# Altium PCB TransceiverBoard.PcbDoc (part 2 of 2)
Units mm, origin at the board's own origin, x right, y up, seen from the top; angles counter-clockwise.
Board outline 152.4 x 101.6 mm, 4 copper layers (Top Layer, Layer 2, Layer 1, Bottom Layer), stack 1.57 mm thick; 106 components, 66 nets, 334 pads, 4 vias.
Unrouted connection lines stored in the file: 243.
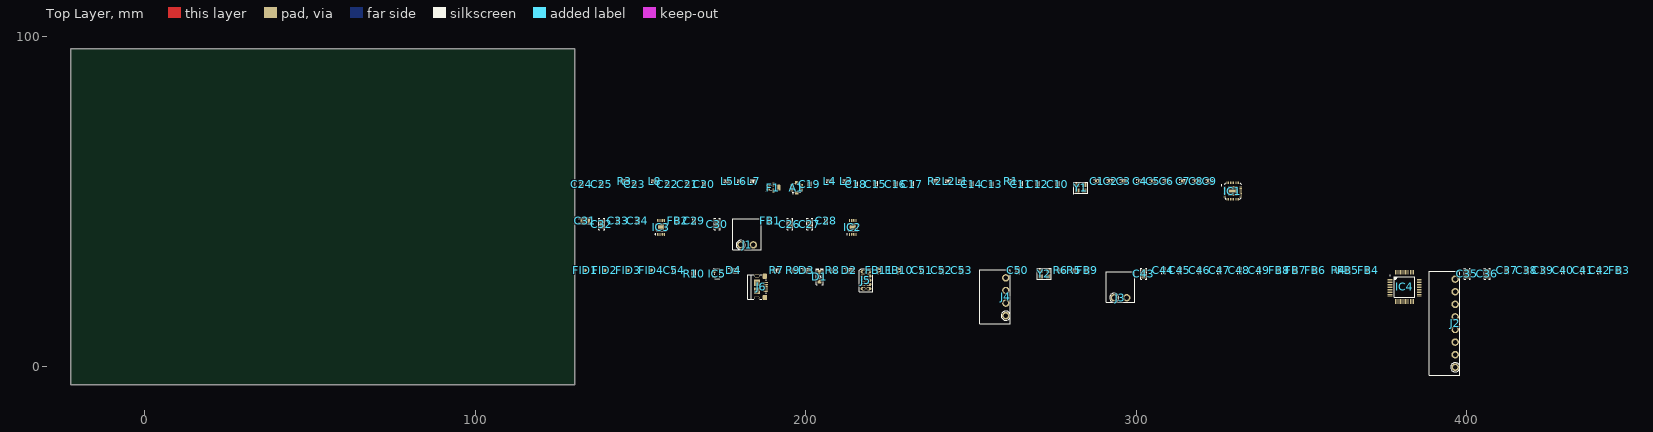
[diagram p0: Top Layer view]

## Part data (continued)
FB1 FB2 FB3 FB4 FB5 FB6 FB7 FB8 FB9 FB10 FB11: library part "Ferrite Chip", "Ferrite Beads Multi-Layer 1KOhm 25% 100MHz 350mA 490mOhm DCR 0402 T/R", Case Code (Imperial)=0402, Case Code (Metric)=1005, Current Rating=350mA, DC Resistance (DCR)=490mR, Manufacturer 1=Murata, Manufacturer Part Number 1=BLM15AX102SN1D, Max Operating Temperature=125°C, Min Operating Temperature=-55°C, Package Quantity=1, Supplier Part Number 1=490-5442-1-ND, Test Frequency=100MHz, Tolerance=25%, Case/Package=0402, Category="Ferrite Beads and Chips", ComponentLink1Description=https://datasheet.ciiva.com/41425/001171674-da-01-en-chip-drossel0402-1000r-350ma-1-0x0-5mm-41425706.pdf?src-supplier=Conrad, ComponentLink1URL=https://datasheet.ciiva.com/41425/001171674-da-01-en-chip-drossel0402-1000r-350ma-1-0x0-5mm-41425706.pdf?src-supplier=Conrad, ComponentLink2Description=https://datasheet.ciiva.com/41449/001172166-da-01-en-drossel-0402-1000r-31-0x0-5mm-10000st-41449452.pdf?src-supplier=Conrad, ComponentLink2URL=https://datasheet.ciiva.com/41449/001172166-da-01-en-drossel-0402-1000r-31-0x0-5mm-10000st-41449452.pdf?src-supplier=Conrad, ComponentLink3Description=https://datasheet.ciiva.com/1012/l0110e-1012389.pdf?src-supplier=Digi-Key, ComponentLink3URL=https://datasheet.ciiva.com/1012/l0110e-1012389.pdf?src-supplier=Digi-Key, ComponentLink4Description=https://datasheet.ciiva.com/1012/l0110e-1012390.pdf?src-supplier=Digi-Key, ComponentLink4URL=https://datasheet.ciiva.com/1012/l0110e-1012390.pdf?src-supplier=Digi-Key, ComponentLink5Description=https://datasheet.ciiva.com/1012/l0110e-1012391.pdf?src-supplier=Digi-Key, ComponentLink5URL=https://datasheet.ciiva.com/1012/l0110e-1012391.pdf?src-supplier=Digi-Key, ComponentLink6Description=https://datasheet.ciiva.com/16420/l0110s0100blm15ax-sn-16420798.pdf?src-supplier=Future+Electronics, ComponentLink6URL=https://datasheet.ciiva.com/16420/l0110s0100blm15ax-sn-16420798.pdf?src-supplier=Future+Electronics, Depth=0.5mm, Height=0.5mm, Impedance=1kR, Lead Free="Lead Free", Length=1mm, Material=Ferrite,Steel, Max Current Rating=350mA, Max DC Current=350mA, Number of Circuits=1, Number of Lines=1, Number of Pins=2, Packaging="Tape and Reel", Pricing 1="1=0.11000, 10=0.09000, 25=0.08120, 50=0.05960, 100=0.05140, 250=0.04060, 500=0.03428, 1000=0.02886, 5000=0.02571 (USD)", REACH SVHC="No SVHC", RoHS=Yes, Stock 1=214606, Supplier 1=Digi-Key, Termination=SMD/SMT, Width=0.5mm
IC1: library part "SCH - RF - IC - TI CC1120", "RF Transceiver Ultra-Hi Perf RF Narrowbd Transceiver", Case/Package=VQFN, Current - Receiving=27mA, Current - Transmitting=56mA, Frequency=960MHz, Manufacturer 1="Texas Instruments", Manufacturer Part Number 1=CC1125RHBT, Max Operating Temperature=85°C, Max Supply Voltage=3.6V, Min Operating Temperature=-40°C, Min Supply Voltage=2V, Package Quantity=250, Supplier Part Number 1=296-38891-1-ND, Category="Interface ICs", ComponentLink1Description=https://datasheet.ciiva.com/12179/swrs120a-224860-12179361.pdf?src-supplier=Mouser, ComponentLink1URL=https://datasheet.ciiva.com/12179/swrs120a-224860-12179361.pdf?src-supplier=Mouser, ComponentLink2Description=https://datasheet.ciiva.com/46417/1816568-46417707.pdf?src-supplier=Element14, ComponentLink2URL=https://datasheet.ciiva.com/46417/1816568-46417707.pdf?src-supplier=Element14, ComponentLink3Description=https://datasheet.ciiva.com/46417/1816568-46417708.pdf?src-supplier=Element14, ComponentLink3URL=https://datasheet.ciiva.com/46417/1816568-46417708.pdf?src-supplier=Element14, Contact Plating=Gold,Silver, Data Rate=200Kbps, Density=0B, Interface=SPI, Lead Free="Lead Free", Max Frequency=960MHz, Memory Size=256B, Mount="Surface Mount", Number of GPIO=4, Number of Pins=32, Number of Receivers=1, Number of Transmitters=1, Packaging="Tape and Reel", Pricing 1="1=6.66000, 10=5.94800, 25=5.35360, 100=4.87760 (USD)", REACH SVHC="No SVHC", RoHS=Yes, Sensitivity=-120dBm, Stock 1=160, Supplier 1=Digi-Key
IC2 IC3: library part "LT LT1965 DD/MS8E", "IC REG LINEAR 3.3V 1.1A 8MSOP", Case/Package=SOP, Dropout Voltage=310mV, Manufacturer 1="Analog Devices / Linear Technology", Manufacturer Part Number 1=LT1965EMS8E-3.3#PBF, Max Input Voltage=20V, Max Operating Temperature=125°C, Min Current Limit=1.2A, Min Input Voltage=1.8V, Min Operating Temperature=-40°C, Operating Supply Current=500uA, Output Current=1.1A, Output Voltage=3.3V, Package Quantity=50, Power Supply Rejection Ratio (PSRR)=75dB, Supplier Part Number 1=LT1965EMS8E-3.3#PBF-ND, Category="Voltage Regulators - Switching", ComponentLink1Description=https://datasheet.ciiva.com/2041/25320-2041526.pdf?src-supplier=Digi-Key, ComponentLink1URL=https://datasheet.ciiva.com/2041/25320-2041526.pdf?src-supplier=Digi-Key, Number of Outputs=1, Number of Pins=8, Number of Regulators=1, Packaging=Rail/Tube, Polarity=Positive, Pricing 1="1=3.95000, 25=2.77000, 100=2.36000, 250=2.26560, 500=2.19480 (USD)", RoHS=Yes, Stock 1=719, Supplier 1=Digi-Key
IC4: "IC MCU 32BIT 256KB FLASH 48LQFP", Case/Package=LQFP, Frequency=72MHz, Manufacturer 1="NXP Semiconductors", Manufacturer Part Number 1=LPC1549JBD48QL, Max Operating Temperature=105°C, Max Power Dissipation=1.5W, Max Supply Voltage=3.6V, Min Operating Temperature=-40°C, Min Supply Voltage=2.4V, Operating Supply Voltage=3.3V, Package Quantity=250, Supplier Part Number 1=568-11349-ND, Category=Microcontrollers, ComponentLink1Description=https://datasheet.ciiva.com/29718/lpc15xx-29718838.pdf?src-supplier=Digi-Key, ComponentLink1URL=https://datasheet.ciiva.com/29718/lpc15xx-29718838.pdf?src-supplier=Digi-Key, ComponentLink2Description=https://datasheet.ciiva.com/46427/1802143-46427720.pdf?src-supplier=Element14, ComponentLink2URL=https://datasheet.ciiva.com/46427/1802143-46427720.pdf?src-supplier=Element14, Core Architecture=ARM, Data Bus Width=32b, Interface=I2C,SPI,USB,CAN,UART,USART, Lead Free="Lead Free", Max Frequency=72MHz, Memory Size=256KB, Memory Type=FLASH, Number of ADC Channels=16, Number of I/Os=30, Number of Pins=48, Number of Programmable I/O=30, Number of Timers/Counters=4, Oscillator Type=Internal, Packaging=Tray, Peripherals="Brown-out Detect/Reset,POR,PWM,WDT,DMA", Pricing 1="1=7.29000, 10=6.58500, 25=6.27920, 100=5.45210, 500=4.74766, 1000=4.13505 (USD)", Radiation Hardening=No, RAM Size=36KB, REACH SVHC="No SVHC", RoHS=Yes, Stock 1=822, Supplier 1=Digi-Key, Watchdog Timer=Yes, Weight=6.287584oz
IC5: library part "NXP PRTR5V0U2X", "TVS DIODE 5.5V SOT143B", Manufacturer 1="Nexperia USA", Manufacturer Part Number 1=PRTR5V0U2X,215, Supplier Part Number 1=1727-3884-1-ND, ComponentLink1Description=https://assets.nexperia.com/documents/data-sheet/PRTR5V0U2X.pdf?src-supplier=Digi-Key, ComponentLink1URL=https://assets.nexperia.com/documents/data-sheet/PRTR5V0U2X.pdf?src-supplier=Digi-Key, Pricing 1="1=0.52000, 10=0.44700, 100=0.33400, 500=0.26240, 1000=0.20276 (USD)", RoHS=No, Stock 1=224080, Supplier 1=Digi-Key
J1 J3: "TERM BLOCK HDR 2POS 90DEG 3.81MM", Manufacturer 1=Amphenol, Manufacturer Part Number 1=OQ0232510000G, Supplier Part Number 1=609-3819-ND, ComponentLink1Description=http://www.anytek.com.tw/UserUpFiles/20120526/jMKyryrC5T7A.pdf?src-supplier=Digi-Key, ComponentLink1URL=http://www.anytek.com.tw/UserUpFiles/20120526/jMKyryrC5T7A.pdf?src-supplier=Digi-Key, Pricing 1="1=0.49000, 10=0.25600, 25=0.18120, 50=0.15420, 100=0.14870, 250=0.12572, 500=0.11628, 1000=0.10275, 5000=0.07842 (USD)", RoHS=No, Stock 1=14534, Supplier 1=Digi-Key
J2: "TERM BLOCK HDR 8POS 90DEG 3.81MM", Manufacturer 1="Amphenol Anytek", Manufacturer Part Number 1=OQ0832510000G, Supplier Part Number 1=609-3825-ND, ComponentLink1Description=http://www.anytek.com.tw/UserUpFiles/20120526/jMKyryrC5T7A.pdf?src-supplier=Digi-Key, ComponentLink1URL=http://www.anytek.com.tw/UserUpFiles/20120526/jMKyryrC5T7A.pdf?src-supplier=Digi-Key, Pricing 1="1=1.06000, 10=0.66200, 25=0.56640, 50=0.50920, 100=0.49860, 250=0.42432, 500=0.40310, 1000=0.36067, 5000=0.28217 (USD)", RoHS=No, Stock 1=4787, Supplier 1=Digi-Key
J4: "TERM BLOCK HDR 4POS 90DEG 3.81MM", Manufacturer 1="Amphenol Anytek", Manufacturer Part Number 1=OQ0432510000G, Supplier Part Number 1=609-3821-ND, ComponentLink1Description=http://www.anytek.com.tw/UserUpFiles/20120526/jMKyryrC5T7A.pdf?src-supplier=Digi-Key, ComponentLink1URL=http://www.anytek.com.tw/UserUpFiles/20120526/jMKyryrC5T7A.pdf?src-supplier=Digi-Key, Pricing 1="1=0.71000, 10=0.39000, 25=0.29160, 50=0.25980, 100=0.25480, 250=0.22424, 500=0.20384, 1000=0.18346, 5000=0.13759 (USD)", RoHS=No, Stock 1=2323, Supplier 1=Digi-Key
J6: library part "USB 2.0 Type B Micro", "CONN RCPT USB2.0 MICRO B SMD R/A", Color=Black, Current Rating=1.8A, Flammability Rating="UL94 V-0", Insulation Resistance=1GR, Manufacturer 1="Amphenol FCI", Manufacturer Part Number 1=10118193-0001LF, Max Operating Temperature=85°C, Max Voltage Rating (AC)=100V, Min Operating Temperature=-55°C, Package Quantity=1200, Supplier Part Number 1=609-4616-1-ND, Category="USB Connectors", ComponentLink1Description=https://datasheet.ciiva.com/851/10118193-851106.pdf?src-supplier=Digi-Key, ComponentLink1URL=https://datasheet.ciiva.com/851/10118193-851106.pdf?src-supplier=Digi-Key, ComponentLink2Description=https://datasheet.ciiva.com/14802/10118193-0001lf-webpage-14802386.pdf?src-supplier=Arrow, ComponentLink2URL=https://datasheet.ciiva.com/14802/10118193-0001lf-webpage-14802386.pdf?src-supplier=Arrow, ComponentLink3Description=https://datasheet.ciiva.com/26853/getdatasheetpartid-418618-26853893.pdf?src-supplier=Verical, ComponentLink3URL=https://datasheet.ciiva.com/26853/getdatasheetpartid-418618-26853893.pdf?src-supplier=Verical, ComponentLink4Description=https://datasheet.ciiva.com/4598/10118193ac-197151-4598799.pdf?src-supplier=Mouser, ComponentLink4URL=https://datasheet.ciiva.com/4598/10118193ac-197151-4598799.pdf?src-supplier=Mouser, ComponentLink5Description=https://datasheet.ciiva.com/851/10118193-851107.pdf?src-supplier=Digi-Key, ComponentLink5URL=https://datasheet.ciiva.com/851/10118193-851107.pdf?src-supplier=Digi-Key, ComponentLink6Description=https://datasheet.ciiva.com/851/10118193-851108.pdf?src-supplier=Digi-Key, ComponentLink6URL=https://datasheet.ciiva.com/851/10118193-851108.pdf?src-supplier=Digi-Key, ComponentLink7Description=https://datasheet.ciiva.com/14618/70236827-14618887.pdf?src-supplier=Allied+Electronics, ComponentLink7URL=https://datasheet.ciiva.com/14618/70236827-14618887.pdf?src-supplier=Allied+Electronics, Connector Type=USB,Receptacle, Contact Material="Copper Alloy", Contact Plating=Gold, Depth=5.67mm, Features=Shielded, Gender=Female, Housing Material=Polymer, Length=7.86mm, Mount="Surface Mount,Horizontal", Number of Contacts=5, Number of Ports=1, Number of Terminals=5, Orientation="Right Angle", Packaging="Tape and Reel", Pitch=0.65mm, Pricing 1="1=0.43000, 10=0.40500, 25=0.36440, 50=0.32400, 100=0.31040, 250=0.28344, 500=0.26994 (USD)", Radiation Hardening=No, RoHS=Yes, Stock 1=110752, Supplier 1=Digi-Key, Termination=Solder, Voltage Rating=100V
L1 L4: library part Inductor, "Inductor RF Chip Unshielded Wirewound 27nH 2% 100MHz 30Q-Factor Non Magnetic 680mA 288mOhm DCR 0402 T/R", Case Code (Imperial)=0402, Case Code (Metric)=1005, Current Rating=680mA, DC Resistance (DCR)=288mR, Manufacturer 1=Murata, Manufacturer Part Number 1=LQW15AN27NG80D, Max Operating Temperature=125°C, Min Operating Temperature=-55°C, Package Quantity=10000, Self Resonant Frequency=4GHz, Supplier Part Number 1=490-18129-1-ND, Test Frequency=100MHz, Tolerance=2%, Case/Package=0402, Category="Fixed Inductors", ComponentLink1Description=https://datasheet.ciiva.com/24050/product-24050902.pdf?src-supplier=Mouser, ComponentLink1URL=https://datasheet.ciiva.com/24050/product-24050902.pdf?src-supplier=Mouser, Composition=Wirewound, Core Material=Ferrite, Height=0.5mm, Height - Seated (Max)=0.024inch, Inductance=27nH, Length=0.039inch, Max DC Current=680mA, Mount="Surface Mount", Packaging="Tape and Reel", Pricing 1="1=0.25000, 10=0.22100, 100=0.15180, 500=0.12972, 1000=0.09936, 2500=0.09384 (USD)", Q Factor=30, RoHS=Yes, Shielding=Unshielded, Stock 1=4331, Supplier 1=Digi-Key, Termination=SMD/SMT, Width=0.024inch
L2 L8: library part Inductor, "Fixed Inductors 56nH 2%", Case Code (Imperial)=0402, Case Code (Metric)=1005, Current=700mA, Current Rating=200mA, DC Resistance (DCR)=1.17R, Manufacturer 1=Murata, Manufacturer Part Number 1=LQW15AN56NG00D, Max Operating Temperature=125°C, Min Operating Temperature=-55°C, Package Quantity=10000, Self Resonant Frequency=2.8GHz, Supplier Part Number 1=490-6830-1-ND, Test Frequency=100MHz, Tolerance=2%, Case/Package=0402, Category="Fixed Inductors", ComponentLink1Description=https://datasheet.ciiva.com/11799/0900766b8090d800-11799113.pdf?src-supplier=RSComponents, ComponentLink1URL=https://datasheet.ciiva.com/11799/0900766b8090d800-11799113.pdf?src-supplier=RSComponents, ComponentLink2Description=https://datasheet.ciiva.com/6709/l0075s0080lqw15a-00-6709925.pdf?src-supplier=Digi-Key, ComponentLink2URL=https://datasheet.ciiva.com/6709/l0075s0080lqw15a-00-6709925.pdf?src-supplier=Digi-Key, ComponentLink3Description=https://datasheet.ciiva.com/8507/l0075s0080lqw15a-00-8507590.pdf?src-supplier=Avnet, ComponentLink3URL=https://datasheet.ciiva.com/8507/l0075s0080lqw15a-00-8507590.pdf?src-supplier=Avnet, ComponentLink4Description=https://datasheet.ciiva.com/6709/l0075s0080lqw15a-00-6709927.pdf?src-supplier=Digi-Key, ComponentLink4URL=https://datasheet.ciiva.com/6709/l0075s0080lqw15a-00-6709927.pdf?src-supplier=Digi-Key, ComponentLink5Description=https://datasheet.ciiva.com/6709/l0075s0080lqw15a-00-6709929.pdf?src-supplier=Digi-Key, ComponentLink5URL=https://datasheet.ciiva.com/6709/l0075s0080lqw15a-00-6709929.pdf?src-supplier=Digi-Key, ComponentLink6Description=https://datasheet.ciiva.com/4976/product-4976445.pdf?src-supplier=Mouser, ComponentLink6URL=https://datasheet.ciiva.com/4976/product-4976445.pdf?src-supplier=Mouser, ComponentLink7Description=https://datasheet.ciiva.com/17278/l0075s0080lqw15a-00-17278510.pdf?src-supplier=Avnet+Europe, ComponentLink7URL=https://datasheet.ciiva.com/17278/l0075s0080lqw15a-00-17278510.pdf?src-supplier=Avnet+Europe, Core Material=Air,Ferrite, DC Current=200mA, Depth=0.6mm, Height=0.5mm, Inductance=56nH, Lead Free="Lead Free", Length=1mm, Max DC Current=200mA, Military Standard=Not, Mount="Surface Mount", Packaging="Tape and Reel", Pricing 1="1=0.19000, 10=0.17100, 100=0.11390, 500=0.09488, 1000=0.07970, 2500=0.06831 (USD)", Q Factor=25, Radiation Hardening=No, RoHS=Yes, Shielding=Unshielded, Stock 1=20707, Supplier 1=Digi-Key, Termination=SMD/SMT, Weight=2.8E-05oz, Width=0.02inch
L3 L5: library part Inductor, "FIXED IND 15NH 1.15A 114 MOHM", Case Code (Imperial)=0402, Case Code (Metric)=1005, Current Rating=1.15A, DC Resistance (DCR)=114mR, ESR (Equivalent Series Resistance)=60R, Frequency=40MHz, Frequency Stability=25ppm, Frequency Tolerance=10ppm, Load Capacitance=8pF, Manufacturer 1=Murata, Manufacturer Part Number 1=LQW15AN15NG8ZD, Max Operating Temperature=125°C, Min Operating Temperature=-55°C, Ratings=AEC-Q200, Self Resonant Frequency=5.5GHz, Supplier Part Number 1=490-15341-1-ND, Test Frequency=100MHz, Tolerance=2%, Case/Package=0402, ComponentLink1Description=http://search.murata.co.jp/Ceramy/image/img/P02/JELF243A-9138.pdf?src-supplier=Digi-Key, ComponentLink1URL=http://search.murata.co.jp/Ceramy/image/img/P02/JELF243A-9138.pdf?src-supplier=Digi-Key, Composition=Wirewound, Core Material=Non-Magnetic, Inductance=15nH, Mount="Surface Mount", Packaging="Cut Tape", Pricing 1="1=0.25000, 10=0.22500, 100=0.15500, 500=0.13242, 1000=0.10143, 2500=0.09580 (USD)", RoHS=No, Shielding=Unshielded, Stock 1=236, Supplier 1=Digi-Key
L6: library part Inductor, "Fixed Inductors 43nH 2% 100MHz", Case Code (Imperial)=0402, Case Code (Metric)=1005, Current=200mA, Current Rating=250mA, DC Resistance (DCR)=700mR, Inductance Tolerance=2%, Manufacturer 1=Murata, Manufacturer Part Number 1=LQW15AN43NG00D, Max Operating Temperature=125°C, Min Operating Temperature=-55°C, Package Quantity=1, Self Resonant Frequency=3GHz, Supplier Part Number 1=490-6817-1-ND, Test Frequency=100MHz, Case/Package=0402, Category="Fixed Inductors", ComponentLink1Description=https://datasheet.ciiva.com/30488/0900766b8125623e-30488999.pdf?src-supplier=RSComponents, ComponentLink1URL=https://datasheet.ciiva.com/30488/0900766b8125623e-30488999.pdf?src-supplier=RSComponents, ComponentLink2Description=https://datasheet.ciiva.com/8507/l0075s0080lqw15a-00-8507514.pdf?src-supplier=Avnet, ComponentLink2URL=https://datasheet.ciiva.com/8507/l0075s0080lqw15a-00-8507514.pdf?src-supplier=Avnet, ComponentLink3Description=https://datasheet.ciiva.com/6709/l0075s0080lqw15a-00-6709983.pdf?src-supplier=Digi-Key, ComponentLink3URL=https://datasheet.ciiva.com/6709/l0075s0080lqw15a-00-6709983.pdf?src-supplier=Digi-Key, Core Material=Air,Ferrite, DC Current=250mA, Depth=0.6mm, Height=0.5mm, Inductance=43nH, Length=1mm, Max DC Current=250mA, Military Standard=Not, Mount="Surface Mount", Packaging="Tape and Reel", Pricing 1="1=0.19000, 10=0.17100, 100=0.11390, 500=0.09488, 1000=0.07970, 2500=0.06831 (USD)", Q Factor=25, REACH SVHC="No SVHC", RoHS=Yes, Shielding=Unshielded, Stock 1=19392, Supplier 1=Digi-Key, Termination=SMD/SMT, Tolerance=2%, Weight=2.8E-05oz, Width=0.5mm
L7: library part Inductor, "FIXED IND 22NH 780MA 202 MOHM", Case Code (Imperial)=0402, Case Code (Metric)=1005, Current Rating=780mA, DC Resistance (DCR)=202mR, Manufacturer 1=Murata, Manufacturer Part Number 1=LQW15AN22NG8ZD, Max Operating Temperature=125°C, Min Operating Temperature=-55°C, Ratings=AEC-Q200, Self Resonant Frequency=4.5GHz, Supplier Part Number 1=490-15363-1-ND, Test Frequency=100MHz, Tolerance=2%, Case/Package=0402, ComponentLink1Description=http://search.murata.co.jp/Ceramy/image/img/P02/JELF243A-9138.pdf?src-supplier=Digi-Key, ComponentLink1URL=http://search.murata.co.jp/Ceramy/image/img/P02/JELF243A-9138.pdf?src-supplier=Digi-Key, Composition=Wirewound, Core Material=Non-Magnetic, Inductance=22nH, Mount="Surface Mount", Packaging="Cut Tape", Pricing 1="1=0.25000, 10=0.22500, 100=0.15500, 500=0.13242, 1000=0.10143, 2500=0.09580 (USD)", RoHS=No, Shielding=Unshielded, Stock 1=10361, Supplier 1=Digi-Key
R1: library part Resistor, "RES SMD 10K OHM 5% 1/16W 0402", Case Code (Imperial)=0402, Case Code (Metric)=1005, Manufacturer 1=Yageo, Manufacturer Part Number 1=RC0402JR-0710KL, Max Operating Temperature=155°C, Max Power Dissipation=63mW, Min Operating Temperature=-55°C, Package Quantity=1, Power Rating=62.5mW, Supplier Part Number 1=311-10KJRCT-ND, Temperature Coefficient=100ppm/°C, Tolerance=5%, Voltage Rating=50V, Case/Package=0402, Category="Chip SMD Resistors", ComponentLink1Description=https://datasheet.ciiva.com/2452/pyu-r-int-thick-7-2452626.pdf?src-supplier=Digi-Key, ComponentLink1URL=https://datasheet.ciiva.com/2452/pyu-r-int-thick-7-2452626.pdf?src-supplier=Digi-Key, ComponentLink2Description=https://datasheet.ciiva.com/7850/1018594-7850136.pdf?src-supplier=Element14, ComponentLink2URL=https://datasheet.ciiva.com/7850/1018594-7850136.pdf?src-supplier=Element14, ComponentLink3Description=https://datasheet.ciiva.com/2452/pyu-r-int-thick-7-2452627.pdf?src-supplier=Digi-Key, ComponentLink3URL=https://datasheet.ciiva.com/2452/pyu-r-int-thick-7-2452627.pdf?src-supplier=Digi-Key, ComponentLink4Description=https://datasheet.ciiva.com/2452/pyu-r-int-thick-7-2452628.pdf?src-supplier=Digi-Key, ComponentLink4URL=https://datasheet.ciiva.com/2452/pyu-r-int-thick-7-2452628.pdf?src-supplier=Digi-Key, ComponentLink5Description=https://datasheet.ciiva.com/7850/1018594-7850137.pdf?src-supplier=Element14, ComponentLink5URL=https://datasheet.ciiva.com/7850/1018594-7850137.pdf?src-supplier=Element14, ComponentLink6Description=https://datasheet.ciiva.com/12669/pyu-rc0402-51-rohs-l-6-r-12669687.pdf?src-supplier=Mouser, ComponentLink6URL=https://datasheet.ciiva.com/12669/pyu-rc0402-51-rohs-l-6-r-12669687.pdf?src-supplier=Mouser, Composition="Thick Film", Depth=0.5mm, Features="Moisture Resistant", Height=0.016inch, Lead Free="Lead Free", Length=1mm, Military Standard=Not, Number of Terminations=2, Packaging="Tape and Reel", Pricing 1="1=0.10000, 10=0.01300, 100=0.00530, 1000=0.00236, 2500=0.00205, 5000=0.00169 (USD)", REACH SVHC=Unknown, Resistance=10kR, RoHS=Yes, Stock 1=30477294, Supplier 1=Digi-Key, Termination=SMD/SMT, Width=0.02inch
R2: library part Resistor, "RES SMD 56K OHM 5% 1/16W 0402", Case Code (Imperial)=0402, Case Code (Metric)=1005, Manufacturer 1=Yageo, Manufacturer Part Number 1=RC0402JR-0756KL, Max Operating Temperature=155°C, Min Operating Temperature=-55°C, Power Rating=63mW, Supplier Part Number 1=311-56KJRCT-ND, Temperature Coefficient=100ppm/°C, Tolerance=5%, Voltage Rating=50V, Case/Package=0402, Category="Chip SMD Resistors", ComponentLink1Description=https://datasheet.ciiva.com/7850/1018594-7850229.pdf?src-supplier=Element14, ComponentLink1URL=https://datasheet.ciiva.com/7850/1018594-7850229.pdf?src-supplier=Element14, ComponentLink2Description=https://datasheet.ciiva.com/12577/pyu-rc0402-51-rohs-l-6-r-12577526.pdf?src-supplier=Mouser, ComponentLink2URL=https://datasheet.ciiva.com/12577/pyu-rc0402-51-rohs-l-6-r-12577526.pdf?src-supplier=Mouser, ComponentLink3Description=https://datasheet.ciiva.com/15189/getdatasheetpartid-251833-15189574.pdf?src-supplier=Verical, ComponentLink3URL=https://datasheet.ciiva.com/15189/getdatasheetpartid-251833-15189574.pdf?src-supplier=Verical, ComponentLink4Description=https://datasheet.ciiva.com/16742/pyu-rc0402-51-rohs-l-6-r-16742167.pdf?src-supplier=Future+Electronics, ComponentLink4URL=https://datasheet.ciiva.com/16742/pyu-rc0402-51-rohs-l-6-r-16742167.pdf?src-supplier=Future+Electronics, ComponentLink5Description=https://datasheet.ciiva.com/7983/1018594-7983592.pdf?src-supplier=Element14, ComponentLink5URL=https://datasheet.ciiva.com/7983/1018594-7983592.pdf?src-supplier=Element14, ComponentLink6Description=https://datasheet.ciiva.com/16862/pyu-rc0402-51-rohs-l-6-16862495.pdf?src-supplier=Avnet+Europe, ComponentLink6URL=https://datasheet.ciiva.com/16862/pyu-rc0402-51-rohs-l-6-16862495.pdf?src-supplier=Avnet+Europe, Composition="Thick Film", Contact Plating=Tin,Matte, Depth=0.5mm, Height=0.35mm, Lead Free="Lead Free", Length=1mm, Military Standard=Not, Number of Terminations=2, Packaging="Tape and Reel", Pricing 1="1=0.10000, 10=0.01300, 100=0.00530, 1000=0.00236, 2500=0.00205, 5000=0.00169 (USD)", Radiation Hardening=No, REACH SVHC=Unknown, Resistance=56kR, RoHS=Yes, Stock 1=498633, Supplier 1=Digi-Key, Termination=SMD/SMT, Weight=2.3E-05oz, Width=0.5mm, Working Voltage=50V
R3: library part Resistor, "YAGEO (PHYCOMP)         RC0402FR-0718RL             SMD Chip Resistor, Thick Film, 18 ohm, 50 V, 0402 [1005 Metric], 63 mW,  1%, RC Series", Case Code (Imperial)=0402, Case Code (Metric)=1005, Manufacturer 1=Yageo, Manufacturer Part Number 1=RC0402FR-0718RL, Max Operating Temperature=155°C, Max Power Dissipation=63mW, Min Operating Temperature=-55°C, Power Rating=62.5mW, Supplier Part Number 1=YAG3021CT-ND, Temperature Coefficient=100ppm/°C, Tolerance=1%, Voltage Rating=50V, Case/Package=0402, Category="Chip SMD Resistors", ComponentLink1Description=https://datasheet.ciiva.com/17332/pyu-rc0402-51-rohs-l-6-17332587.pdf?src-supplier=Future+Electronics, ComponentLink1URL=https://datasheet.ciiva.com/17332/pyu-rc0402-51-rohs-l-6-17332587.pdf?src-supplier=Future+Electronics, ComponentLink2Description=https://datasheet.ciiva.com/12577/pyu-rc0402-51-rohs-l-6-r-12577388.pdf?src-supplier=Mouser, ComponentLink2URL=https://datasheet.ciiva.com/12577/pyu-rc0402-51-rohs-l-6-r-12577388.pdf?src-supplier=Mouser, Composition="Thick Film", Depth=0.5mm, Features="Moisture Resistant", Height=0.016inch, Lead Free="Lead Free", Length=1mm, Military Standard=Not, Number of Terminations=2, Packaging="Tape and Reel", Pricing 1="1=0.10000, 10=0.01600, 100=0.00640, 1000=0.00289, 2500=0.00251, 5000=0.00207 (USD)", REACH SVHC=Unknown, Resistance=18R, RoHS=Yes, Stock 1=229549, Supplier 1=Digi-Key, Termination=SMD/SMT, Weight=2.3E-05oz, Width=0.02inch
R4 R5 R6: library part Resistor, "RES 10K OHM 5% 1/16W 0402", Case Code (Imperial)=0402, Case Code (Metric)=1005, Manufacturer 1="Stackpole Electronics", Manufacturer Part Number 1=RMCF0402JT10K0, Max Operating Temperature=155°C, Max Power Dissipation=63mW, Min Operating Temperature=-55°C, Power Rating=62.5mW, Supplier Part Number 1=RMCF0402JT10K0CT-ND, Temperature Coefficient=100ppm/°C, Tolerance=5%, Working Voltage=50V, Case/Package=0402, Category="Chip SMD Resistors", ComponentLink1Description=https://datasheet.ciiva.com/15193/getdatasheetpartid-360689-15193431.pdf?src-supplier=Verical, ComponentLink1URL=https://datasheet.ciiva.com/15193/getdatasheetpartid-360689-15193431.pdf?src-supplier=Verical, Composition="Thick Film", Contact Plating=Tin,Matte, Depth=0.5mm, Features="Automotive AEC-Q200", Height=0.016inch, Lead Free="Lead Free", Length=1mm, Military Standard=Not, Mount="Surface Mount", Number of Terminations=2, Packaging="Tape and Reel", Pricing 1="1=0.10000, 10=0.01200, 100=0.00480, 1000=0.00214, 2500=0.00186, 5000=0.00154 (USD)", Radiation Hardening=No, Resistance=10kR, RoHS=Yes, Stock 1=966187, Supplier 1=Digi-Key, Width=0.02inch
R7: library part Resistor, "RES SMD 68 OHM 5% 1/16W 0402", Case Code (Imperial)=0402, Case Code (Metric)=1005, Manufacturer 1="Stackpole Electronics", Manufacturer Part Number 1=RMCF0402JT68R0, Max Operating Temperature=155°C, Max Power Dissipation=63mW, Min Operating Temperature=-55°C, Supplier Part Number 1=RMCF0402JT68R0CT-ND, Temperature Coefficient=100ppm/°C, Tolerance=5%, Case/Package=0402, Category="Chip SMD Resistors", ComponentLink1Description=https://www.seielect.com/Catalog/SEI-RMCF_RMCP.pdf?src-supplier=Digi-Key, ComponentLink1URL=https://www.seielect.com/Catalog/SEI-RMCF_RMCP.pdf?src-supplier=Digi-Key, ComponentLink2Description=https://www.seielect.com/catalog/SEI-Packaging.pdf?src-supplier=Digi-Key, ComponentLink2URL=https://www.seielect.com/catalog/SEI-Packaging.pdf?src-supplier=Digi-Key, ComponentLink3Description=https://www.seielect.com/catalog/SEI-RMCF_RMCP.pdf?src-supplier=Avnet, ComponentLink3URL=https://www.seielect.com/catalog/SEI-RMCF_RMCP.pdf?src-supplier=Avnet, ComponentLink4Description=http://www.seielect.com/Catalog/Sei-RMC.pdf?src-supplier=Future+Electronics, ComponentLink4URL=http://www.seielect.com/Catalog/Sei-RMC.pdf?src-supplier=Future+Electronics, Composition="Thick Film", Contact Plating=Tin,Matte, Features="Automotive AEC-Q200", Height=0.016inch, Lead Free="Lead Free", Length=0.039inch, Mount="Surface Mount", Number of Terminations=2, Packaging="Tape and Reel", Power Rating=63mW, Pricing 1="1=0.10000, 10=0.01200, 100=0.00480, 1000=0.00214, 2500=0.00186, 5000=0.00154 (USD)", Radiation Hardening=No, Resistance=68R, RoHS=Yes, Stock 1=5952, Supplier 1=Digi-Key, Width=0.02inch
R8: library part Resistor, "KOA SPEAR ELECTRONICS - RK73B1JTTD470J - RES, 47R, 5%, 0.1W, 0603, THICK FILM", Case Code (Imperial)=0603, Case Code (Metric)=1608, Manufacturer 1="KOA Speer", Manufacturer Part Number 1=RK73B1JTTD470J, Max Operating Temperature=155°C, Min Operating Temperature=-55°C, Power Rating=100mW, Supplier Part Number 1=2019-RK73B1JTTD470JCT-ND, Temperature Coefficient=200ppm/°C, Tolerance=5%, Voltage Rating=50V, Case/Package=0603, Category="Chip SMD Resistors", ComponentLink1Description=https://datasheet.ciiva.com/5554/rk73b-5554549.pdf?src-supplier=Mouser, ComponentLink1URL=https://datasheet.ciiva.com/5554/rk73b-5554549.pdf?src-supplier=Mouser, ComponentLink2Description=https://datasheet.ciiva.com/7763/548635-7763063.pdf?src-supplier=Element14, ComponentLink2URL=https://datasheet.ciiva.com/7763/548635-7763063.pdf?src-supplier=Element14, Composition="Thick Film", Depth=0.8mm, Height=0.45mm, Lead Free="Lead Free", Length=1.6mm, Military Standard=Not, Number of Pins=2, Packaging="Tape and Reel", Pricing 1="1=0.10000, 10=0.01500, 100=0.00610, 1000=0.00275, 2500=0.00239 (USD)", REACH SVHC=Unknown, Resistance=47R, RoHS=Yes, Stock 1=401047, Supplier 1=Digi-Key, Termination=SMD/SMT, Voltage Rating (DC)=50V
R9: library part Resistor, "Res Thick Film 0603 150 Ohm 5% 0.1W(1/10W) ±200ppm/C Molded SMD Automotive Punched Paper T/R", Case Code (Imperial)=0603, Case Code (Metric)=1608, Manufacturer 1="KOA Speer", Manufacturer Part Number 1=RK73B1JTTD151J, Max Operating Temperature=155°C, Min Operating Temperature=-55°C, Package Quantity=5000, Power Rating=100mW, Supplier Part Number 1=2019-RK73B1JTTD151JCT-ND, Temperature Coefficient=200ppm/°C, Tolerance=5%, Voltage Rating=50V, Case/Package=0603, Category="Chip SMD Resistors", ComponentLink1Description=https://datasheet.ciiva.com/5554/rk73b-5554597.pdf?src-supplier=Mouser, ComponentLink1URL=https://datasheet.ciiva.com/5554/rk73b-5554597.pdf?src-supplier=Mouser, ComponentLink2Description=https://datasheet.ciiva.com/7984/548635-7984858.pdf?src-supplier=Element14, ComponentLink2URL=https://datasheet.ciiva.com/7984/548635-7984858.pdf?src-supplier=Element14, ComponentLink3Description=https://datasheet.ciiva.com/15159/getdatasheetpartid-30094-15159292.pdf?src-supplier=Verical, ComponentLink3URL=https://datasheet.ciiva.com/15159/getdatasheetpartid-30094-15159292.pdf?src-supplier=Verical, Composition="Thick Film", Depth=0.8mm, Height=0.45mm, Lead Free="Lead Free", Length=1.6mm, Military Standard=Not, Packaging="Tape and Reel", Pricing 1="1=0.10000, 10=0.01500, 100=0.00610, 1000=0.00275, 2500=0.00239 (USD)", REACH SVHC=Unknown, Resistance=150R, RoHS=Yes, Stock 1=242234, Supplier 1=Digi-Key, Termination=SMD/SMT, Voltage Rating (DC)=50V, Width=0.8mm
R10: library part Resistor, "KOA SPEER ELECTRONICS   RK73B1JTTD121J   Surface Mount Chip Resistor, Thick Film, RK73B Series, 120 ohm, 100 mW,  5%, 50 V", Case Code (Imperial)=0603, Case Code (Metric)=1608, Manufacturer 1="KOA Speer", Manufacturer Part Number 1=RK73B1JTTD121J, Max Operating Temperature=155°C, Min Operating Temperature=-55°C, Package Quantity=5000, Power Rating=100mW, Supplier Part Number 1=2019-RK73B1JTTD121JCT-ND, Temperature Coefficient=200ppm/°C, Tolerance=5%, Voltage Rating=50V, Case/Package=0603, Category="Chip SMD Resistors", ComponentLink1Description=https://datasheet.ciiva.com/15159/getdatasheetpartid-72392-15159751.pdf?src-supplier=Verical, ComponentLink1URL=https://datasheet.ciiva.com/15159/getdatasheetpartid-72392-15159751.pdf?src-supplier=Verical, ComponentLink2Description=https://datasheet.ciiva.com/7773/548635-7773279.pdf?src-supplier=Element14, ComponentLink2URL=https://datasheet.ciiva.com/7773/548635-7773279.pdf?src-supplier=Element14, Composition="Thick Film", Depth=0.8mm, Height=0.45mm, Lead Free="Lead Free", Length=1.6mm, Military Standard=Not, Number of Pins=2, Packaging="Tape and Reel", Pricing 1="1=0.10000, 10=0.01500, 100=0.00610, 1000=0.00275, 2500=0.00239 (USD)", REACH SVHC=Unknown, Resistance=120R, RoHS=Yes, Stock 1=13683, Supplier 1=Digi-Key, Termination=SMD/SMT, Voltage Rating (DC)=50V, Width=0.8mm
Y1: library part "Abracon Crystal ABM8G", "CRYSTAL 32.0000MHZ 10PF SMD", Case/Package=CSMD, ESR (Equivalent Series Resistance)=50R, Frequency Stability=30ppm, Load Capacitance=10pF, Manufacturer 1=Abracon, Manufacturer Part Number 1=ABM8G-32.000MHZ-B4Y-T, Max Operating Temperature=70°C, Min Operating Temperature=-20°C, Package Quantity=1000, Supplier Part Number 1=535-10302-1-ND, Category=Crystals, ComponentLink1Description=https://datasheet.ciiva.com/855/abm8g-855344.pdf?src-supplier=Digi-Key, ComponentLink1URL=https://datasheet.ciiva.com/855/abm8g-855344.pdf?src-supplier=Digi-Key, ComponentLink2Description=https://datasheet.ciiva.com/3176/abm8g-3176102.pdf?src-supplier=Avnet, ComponentLink2URL=https://datasheet.ciiva.com/3176/abm8g-3176102.pdf?src-supplier=Avnet, ComponentLink3Description=https://datasheet.ciiva.com/855/abm8g-855342.pdf?src-supplier=Digi-Key, ComponentLink3URL=https://datasheet.ciiva.com/855/abm8g-855342.pdf?src-supplier=Digi-Key, ComponentLink4Description=https://datasheet.ciiva.com/4945/abm8g-10572-4945294.pdf?src-supplier=Mouser, ComponentLink4URL=https://datasheet.ciiva.com/4945/abm8g-10572-4945294.pdf?src-supplier=Mouser, ComponentLink5Description=https://datasheet.ciiva.com/855/abm8g-855343.pdf?src-supplier=Digi-Key, ComponentLink5URL=https://datasheet.ciiva.com/855/abm8g-855343.pdf?src-supplier=Digi-Key, ComponentLink6Description=https://datasheet.ciiva.com/7998/abm8g-7998639.pdf?src-supplier=Element14, ComponentLink6URL=https://datasheet.ciiva.com/7998/abm8g-7998639.pdf?src-supplier=Element14, Depth=2.5mm, Frequency=32MHz, Frequency Tolerance=30ppm, Height=0.039inch, Lead Free="Lead Free", Length=3.2mm, Mount="Surface Mount", Number of Pins=4, Packaging="Tape and Reel", Pricing 1="1=0.94000, 10=0.83500, 50=0.78040, 100=0.68970, 500=0.65340 (USD)", REACH SVHC=Unknown, RoHS=Yes, Series Resistance=50R, Stock 1=51278, Supplier 1=Digi-Key, Termination=SMD/SMT, Tolerance=30ppm, Width=0.098inch
Y2: library part "Abracon Crystal ABM8G", "CRYSTAL 12.0000MHZ 18PF SMD", Case/Package=SMD/SMT, ESR (Equivalent Series Resistance)=120R, Frequency Stability=30ppm, Frequency Tolerance=20ppm, Load Capacitance=18pF, Manufacturer 1=Abracon, Manufacturer Part Number 1=ABM8G-12.000MHZ-18-D2Y-T3, Max Operating Temperature=85°C, Min Operating Temperature=-40°C, Package Quantity=3000, Supplier Part Number 1=535-14128-1-ND, Category=Crystals, ComponentLink1Description=https://datasheet.ciiva.com/862/abm8g-862338.pdf?src-supplier=Digi-Key, ComponentLink1URL=https://datasheet.ciiva.com/862/abm8g-862338.pdf?src-supplier=Digi-Key, ComponentLink2Description=https://datasheet.ciiva.com/16411/abm8g-16411115.pdf?src-supplier=Future+Electronics, ComponentLink2URL=https://datasheet.ciiva.com/16411/abm8g-16411115.pdf?src-supplier=Future+Electronics, Frequency=12MHz, Height=0.039inch, Lead Free="Lead Free", Length=0.126inch, Mount="Surface Mount", Number of Pins=4, Packaging="Tape and Reel", Pricing 1="1=1.00000, 10=0.88600, 50=0.82780, 100=0.73150, 500=0.69300, 1000=0.57750 (USD)", RoHS=Yes, Series Resistance=120R, Stock 1=1612, Supplier 1=Digi-Key, Termination=SMD/SMT, Tolerance=20ppm, Width=0.098inch

## Via types
v1: diameter 0.8/0.8/0.8 (per signal layer), hole 0.4, Top Layer to Bottom Layer, 4 vias

## Nets (pads, with @x,y where several pads share a name; then routed paths per layer and width w, separated by ;. In a path a pad name is that pad's centre, name@x,y a point inside that pad or via, vN(x,y) a via of type N, cw(c..) or ccw(c..) an arc to the next point about the centre after c; other vN are vias at no path point)
3V3: C27.2 C28.2 C35.2 FB3.2 FB8.2 IC2.1 IC2.2 IC2.3 J4.1 R8.1
5VIN: C26.2 C30.2 C31.2 D1.2 FB1.1 IC2.6 IC2.7 IC2.8 IC3.6 IC3.7 IC3.8
ADC_IN0: FB4.2 IC4.6
ADC_IN1: FB5.2 IC4.7
ADC_IN2: FB6.2 IC4.8
ADC_IN3: FB7.2 IC4.9
CC_GP0: IC1.10 IC4.1
CC_GP2: IC1.4 IC4.47
CC_GP3: IC1.3 IC4.48
CC_MISO: IC1.9 IC4.45
CC_MOSI: IC1.7 IC4.43
CC_RESET: IC1.2 R1.1
CC_SCLK: IC1.8 IC4.44
CC_SSEL: IC1.11 IC4.46
DAC_OUT: FB9.2 IC4.19
DCPL: C15.2 IC1.6
DCPL_PFD: C17.2 IC1.26
DCPL_VCO: C16.2 IC1.21
DCPL_XO: C10.2 IC1.29
GND: A1.G C1.1 C2.1 C3.1 C4.1 C5.1 C6.1 C7.1 C8.1 C9.1 C10.1 C11.1 C12.1 C13.2 C15.1 C16.1 C17.1 C21.1 C24.1 C25.1 C26.1 C27.1 C28.1 C29.1 C30.1 C31.1 C32.1 C33.1 C34.1 C35.1 C36.1 C37.1 C38.1 C39.1 C40.1 C41.1 C42.1 C43.1 C44.1 C45.1 C46.1 C47.1 C48.1 C49.1 C50.1 C51.1 C52.1 C53.1 C54.1 D2.2 D3.2 D4.2 F1.2 F1.4 IC1.32 IC1.33 IC2.4 IC2.5 IC2.9 IC3.4 IC3.5 IC3.9 IC4.11 IC4.17 IC4.20 IC4.40 IC4.41 IC5.1 J1.2 J2.2 J2.4 J2.6 J2.8 J3.2 J4.4 J5.5 J5.9 J6.5 J6.S L4.2 R2.2 Y1.2 Y1.4 Y2.2 Y2.4
  other v1: 328.648,52.539 329.848,52.539 328.648,53.739 329.848,53.739
ISP_0: IC4.5 R4.2
ISP_1: IC4.24 R5.2
LED_LINK: IC4.21 R9.1
LED_STATUS: IC4.22 R10.1
LNA_N: C13.1 IC1.20 L1.1 L2.1
LNA_P: C18.1 IC1.19 L2.2 L4.1
LPF0: C14.2 IC1.23
LPF1: C14.1 IC1.24
MCU_VDD: C36.2 C37.2 C38.2 C39.2 C40.2 C41.2 C42.2 C53.2 FB3.1 IC4.27 IC4.30 IC4.39 IC4.42 J5.1 R4.1 R5.1 R6.1
MCU_VDDA: C43.2 C44.2 C45.2 C46.2 C47.2 C48.2 C49.2 FB8.1 IC4.10 IC4.14 IC4.16
NetA1_S: A1.S F1.1
NetC18_2: C18.2 L1.2 L3.1
NetC19_1: C19.1 C22.1 L5.2 L6.1
NetC19_2: C19.2 IC1.18 L3.2
NetC20_1: C20.1 IC1.17 L8.1
NetC20_2: C20.2 C22.2 L5.1
NetC21_2: C21.2 L6.2 L7.1
NetC23_2: C23.2 L8.2 R3.2
NetC29_2: C29.2 FB1.2 J1.1
NetC32_2: C32.2 C33.2 FB2.2 IC3.1 IC3.2 IC3.3
NetC51_2: C51.2 IC4.26 Y2.1
NetC52_2: C52.2 IC4.25 Y2.3
NetD1_1: D1.1 J6.1 R7.2
NetD2_1: D2.1 R8.2
NetD3_1: D3.1 R9.2
NetD4_1: D4.1 R10.2
NetF1_3: F1.3 L7.2
NetFB4_1: FB4.1 J2.1
NetFB5_1: FB5.1 J2.3
NetFB6_1: FB6.1 J2.5
NetFB7_1: FB7.1 J2.7
NetFB9_1: FB9.1 J3.1
NetFB10_1: FB10.1 J4.2
NetFB11_1: FB11.1 J4.3
RBIAS: IC1.14 R2.1
RESET: C50.2 IC4.34 J5.10 R6.2
SWCLK: IC4.29 J5.2
SWDIO: IC4.33 J5.4
UART_RX: FB11.2 IC4.13
UART_TX: FB10.2 IC4.12
USB_VBUS_I: C54.2 IC4.37 IC5.4 R7.1
USBD_N: IC4.36 IC5.2 J6.2
USBD_P: IC4.35 IC5.3 J6.3
VDD_CC: C1.2 C2.2 C3.2 C4.2 C5.2 C6.2 C7.2 C8.2 C9.2 C23.1 C24.2 C25.2 C34.2 FB2.1 IC1.1 IC1.5 IC1.12 IC1.13 IC1.15 IC1.22 IC1.25 IC1.27 IC1.28 R1.2 R3.1
XO_Q1: C11.2 IC1.30 Y1.1
XO_Q2: C12.2 IC1.31 Y1.3
pads on no net: FID1.F FID2.F FID3.F FID4.F IC1.16 IC4.2 IC4.3 IC4.4 IC4.15 IC4.18 IC4.23 IC4.28 IC4.31 IC4.32 IC4.38 J5.3 J5.6 J5.7 J5.8 J6.4

## Polygon pours and split planes (outlines as drawn)
no net on Layer 2 (split plane): 129.538,-4.951 -21.842,-4.951 -21.842,95.629 129.538,95.629